# Altium PCB Pinger Final PCB.PcbDoc
Units mil, origin at the board's own origin, x right, y up, seen from the top; angles counter-clockwise.
Board outline 2563 x 1768 mil, 2 copper layers (Top Layer, Bottom Layer); 33 components, 29 nets, 138 pads, 187 vias.
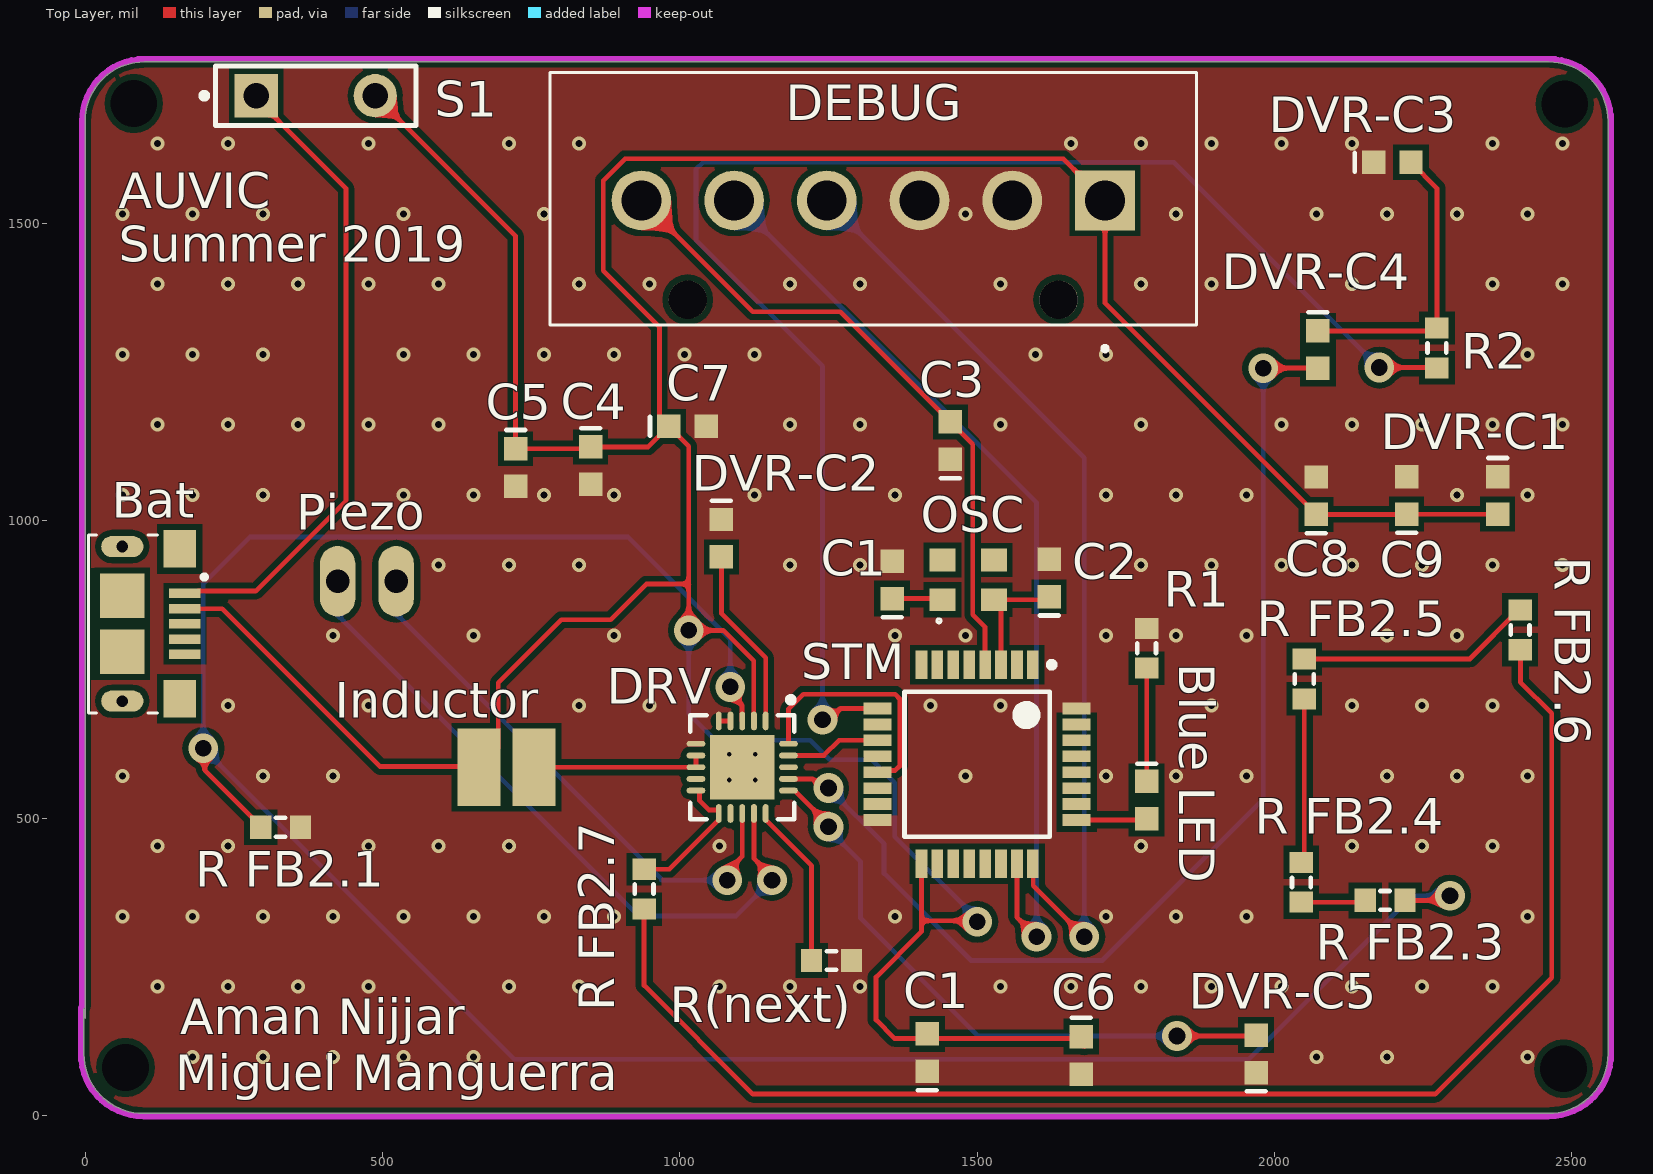
[diagram p0: Top Layer view]
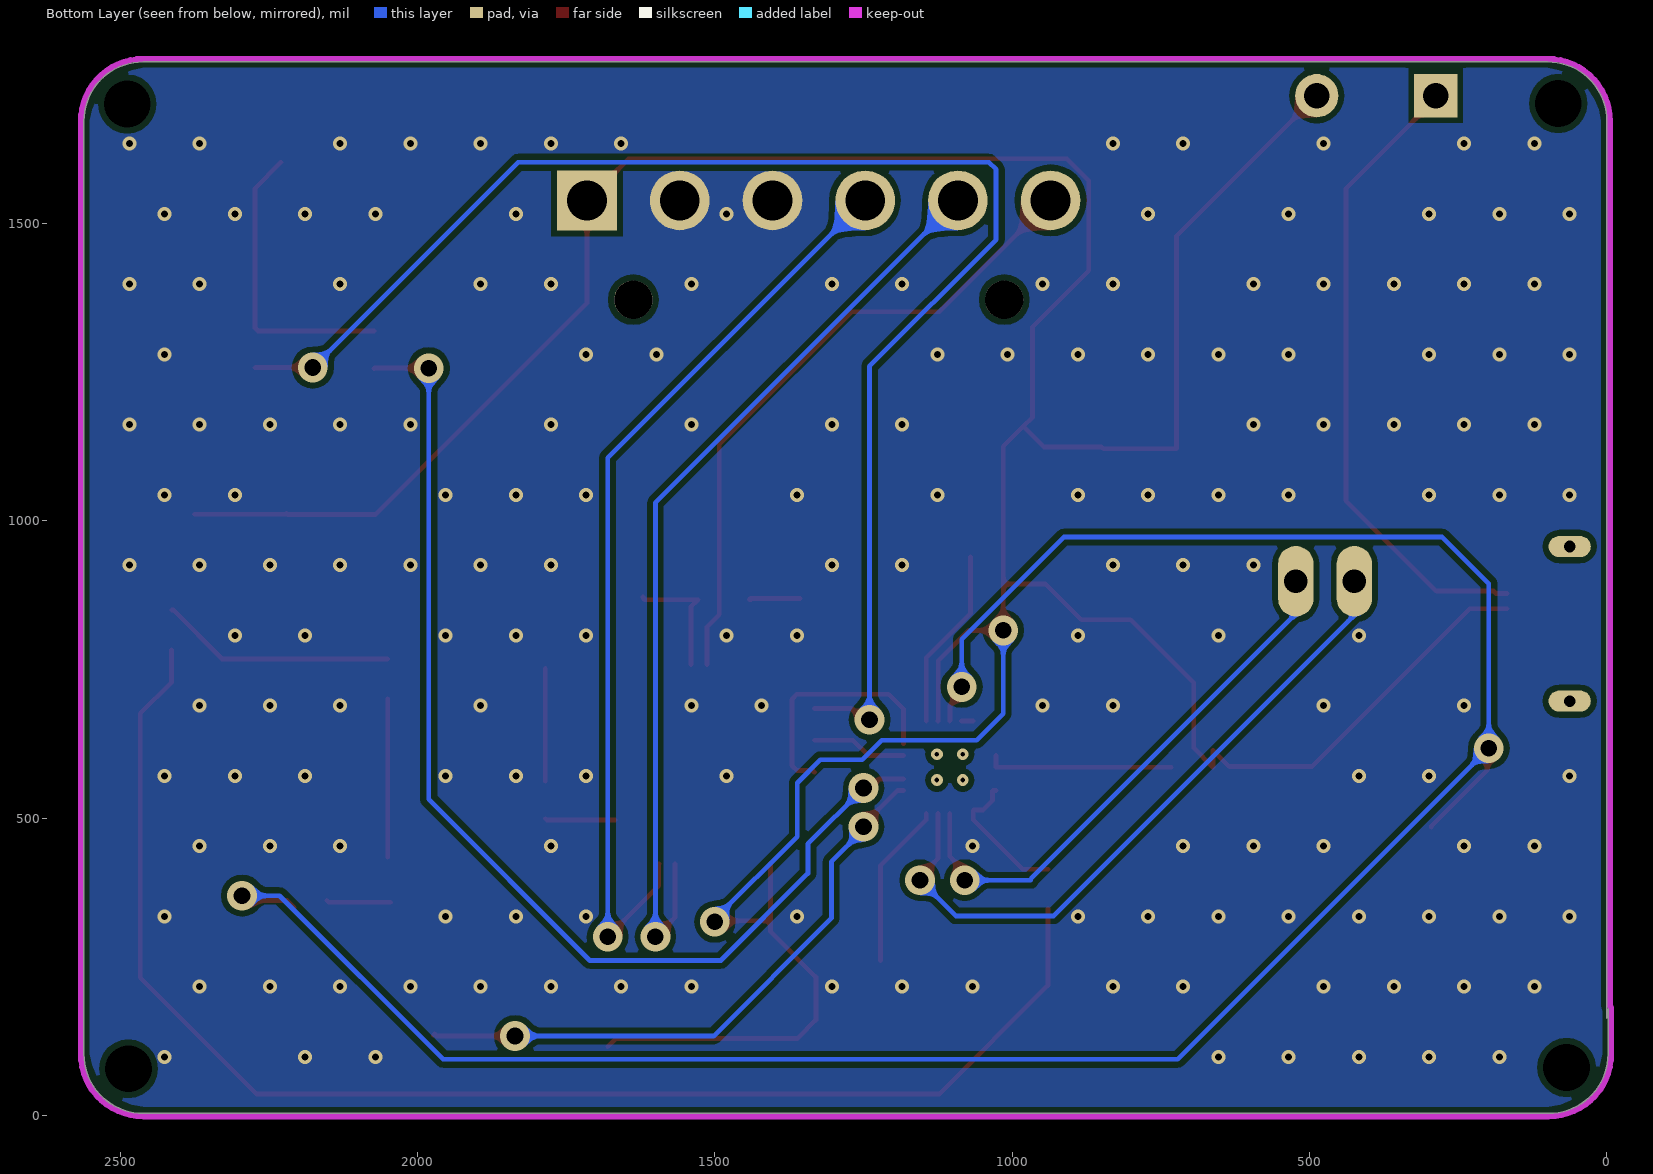
[diagram p1: Bottom Layer view, seen from below]
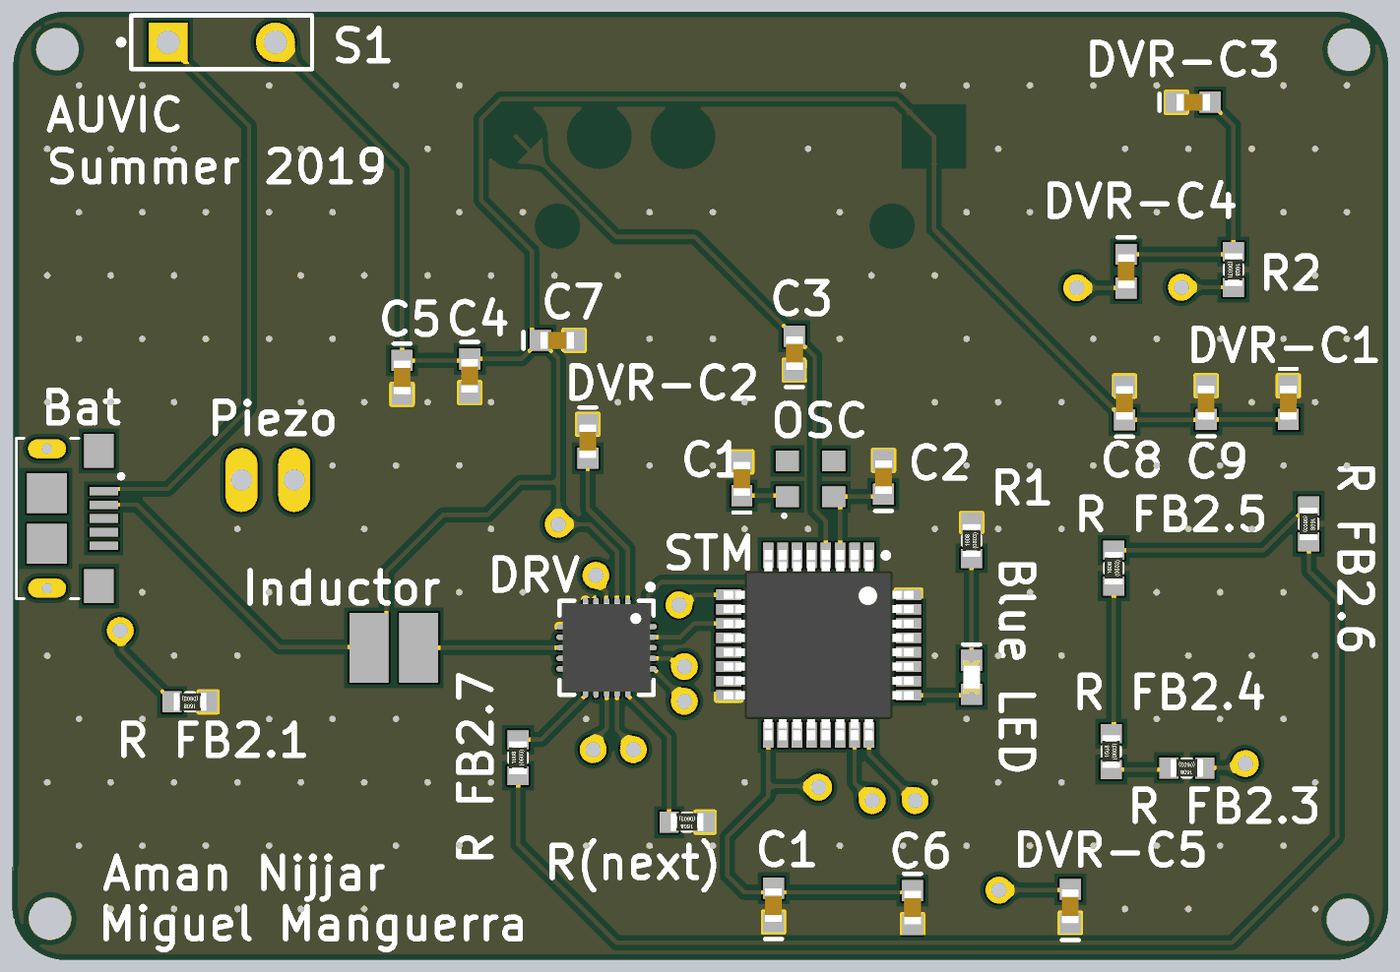
[diagram p2: 3D render of the assembled board from above, using the file's embedded part models]

## Layer stack, top to bottom
Top Solder: solder mask 0.4, Solder Resist, Dk 3.5
Top Layer: signal copper 1.4
Dielectric 1: dielectric 12.6, FR-4, Dk 4.8
Bottom Layer: signal copper 1.4
Bottom Solder: solder mask 0.4, Solder Resist, Dk 3.5

## Board outline
0,164 0,1672 cw(c100,1672) 100,1772 2461,1772 cw(c2461,1672) 2561,1672 2561,104 cw(c2461,104) 2461,4 98,4 cw(c98,104) -2,104 -2,180

## Design rules (kind name [scope] priority, off if disabled: settings)
Clearance [All] p1: gap=10 ignorepadtopadclearanceinfootprint=TRUE except(0: Arc-Hole Track-Hole SMDPad-Hole THPad-Hole Via-Hole Fill-Hole Poly-Hole Region-Hole Text-Hole)
PolygonConnect [All] p1: connectstyle=Direct reliefconductorwidth=10 reliefentries=4 polygonreliefangle="90 Angle" airgapwidth=10
RoutingVias [All] p1: holewidth=28 width=50 viastyle="Through Hole" minholewidth=28 minwidth=50 maxholewidth=28 maxwidth=50
SolderMaskExpansion [All] p1: expansion=4
Width [All] p1: maxlimit=8 minlimit=8 preferedwidth=8 minimp=50.000000 maximp=50.000000 favimp=50.000000
30 further rules are at their usual default settings.

## Classes and differential pairs
component class U_MicroController: "Blue LED" C6 C7 C8 C9 DEBUG DVR-C1 DVR-C2 DVR-C3 DVR-C4 DVR-C5 OSC R1 R2 STM
component class U_DRV2700: DRV DVR-C1 DVR-C2 DVR-C3 DVR-C4 DVR-C5 Inductor Piezo "R FB2.1" "R FB2.3" "R FB2.4" "R FB2.5" "R FB2.6" "R FB2.7" R(next)
component class "Master Schematic Sheet": Bat DVR-C3 S1

## Components (designator, comment, footprint, x,y, rotation, side; value= is the part's Value field where it differs from the comment)
Bat "600mAh 3.6V" *FCI_10118193-0001LF_10118193-0001LF(Primary) 62.68,827 r270 top
"Blue LED" "Blue" LED0603 1785,531 r90 top
C1 "Cap" "CAPC1608N(0603\")" 1416,106 r90 top value=4.7uF
C1 "Cap" "CAPC1608N(0603\")" 1357,901 r90 top value="18 pF"
C2 "Cap" "CAPC1608N(0603\")" 1621,904 r90 top value="18 pF"
C3 "Cap" "CAPC1608N(0603\")" 1455,1135 r90 top value=0.1uF
C4 "Cap" "CAPC1608N(0603\")" 850,1093 r270 top value=0.1uF
C5 "Cap" "CAPC1608N(0603\")" 724,1090 r270 top value=4.7uF
C6 "Cap" "CAPC1608N(0603\")" 1675,101.5 r270 top value=4.7uF
C7 "Cap" "CAPC1608N(0603\")" 1013,1159 r0 top value=0.1uF
C8 "Cap" "CAPC1608N(0603\")" 2070,1042.5 r90 top value=1uF
C9 "Cap" "CAPC1608N(0603\")" 2222,1043 r90 top value=0.01uF
DEBUG "SWD_DEBUGGER" Male_header 2820.24,519 r180 top
DRV "DRV2700" QFN50P400X400X100_HS-21N 1105,586 r270 top
DVR-C1 "+10V rating and X5R or X7R" "CAPC1608N(0603\")" 2375,1043 r270 top value=0.1uF
DVR-C2 "+10V rating and X5R or X7R" "CAPC1608N(0603\")" 1070,971 r270 top value=0.1uF
DVR-C3 "Cap" "CAPC1608N(0603\")" 2198,1603 r0 top value=0.1uF
DVR-C4 "Cap" "CAPC1608N(0603\")" 2073,1288 r270 top value=0.1uF
DVR-C5 "Cap" "CAPC1608N(0603\")" 1969,104 r90 top value=0.1uF
Inductor "CoilCraft" INDP2828X23N 708.74,586 r180 top value=3.3uH
OSC "ABMM2-14.7456MHZ-E2-T" *OSCSC320X250X100N 1485,901 r90 top
Piezo "Pinger" *JST_XHP-2 474,878 r180 top (schematic designator P1)
R1 "Res2" "RESC1608N(0603\")" 1785,786 r90 top value=1K
R2 "Res2" "RESC1608N(0603\")" 2273,1291 r270 top value=4.99K
"R FB2.1" "Res2" "RESC1608N(0603\")" 329,485 r180 top value=10.5K
"R FB2.3" "Res2" "RESC1608N(0603\")" 2186,362 r180 top value=200k
"R FB2.4" "Res2" "RESC1608N(0603\")" 2045,392.46 r90 top value=200k
"R FB2.5" "Res2" "RESC1608N(0603\")" 2050,734.46 r90 top value=200k
"R FB2.6" "Res2" "RESC1608N(0603\")" 2413,817 r270 top value=200k
"R FB2.7" "Res2" "RESC1608N(0603\")" 940,381 r90 top value=10K
R(next) "Res2" "RESC1608N(0603\")" 1255,261 r180 top value=7.32k (schematic designator R(rext))
S1 "SW-SPST" SPST-2 388,1715 r0 top
STM "STM32F051K6T6" TQFP68P900X900X160-32N 1500,591 r270 top

## Footprints (in the part's own frame and the unit in brackets; to place one, negate y for a bottom-side part, rotate by r counter-clockwise, add the part's x,y. Pads: shape width x height; smd on the part's side, far side on the other; paste and mask are expansions set on the pad)
*FCI_10118193-0001LF_10118193-0001LF(Primary) [mm]
  rect 0.4x1.35 smd: 1(-1.3,2.675) 2(-0.65,2.675) 3(0,2.675) 4(0.65,2.675) 5(1.3,2.675)
  round 0.5 hole 0.5 unplated: None(-3.3,0) None(3.3,0)
  rect 1.6x1.4 smd: S1(-3.2,2.45) S2(3.2,2.45)
  rect 1.9x1.9 smd: S3(1.2,0) S4(-1.2,0)
  oval 0.9x1.8 hole 0.5: S5(-3.3,0) S6(3.3,0)
  silkscreen extent -3.8,-1.45 3.8,3.6
*JST_XHP-2 [mm]
  oval 1.508x3.016 hole 1: 1(-1.25,-0.525) 2(1.25,-0.525)
*OSCSC320X250X100N [mm]
  rect 0.98x1.1 smd: 1(-0.85,1.1) 2(-0.85,-1.1) 3(0.85,-1.1) 4(0.85,1.1)
  silkscreen extent -1.84,1.16 -1.66,1.34
"CAPC1608N(0603\")" [mm] "Chip Capacitor, Body 1.6x0.8mm (0603\"), IPC Medium Density"
  rect 1x1 smd: 1(-0.8,0) 2(0.8,0)
  silkscreen extent -1.6,-0.4 -1.6,0.4, body extent -0.8,-0.4 0.8,0.4, height 0.9
INDP2828X23N [mm] "Precision Wire Wound Inductor, 2-Leads, Body 2.80x2.80mm, IPC Medium Density"
  rect 1.85x3.3 smd: 1(-1.175,0) 2(1.175,0)
  body extent -1.5,-1.5 1.5,1.5, height 2.29
LED0603 [mm]
  rect 1x1 smd: 1(0.8,0) 2(-0.8,0)
  silkscreen extent 1.55,-0.4 1.55,0.4, body extent -0.8,-0.4 0.8,0.4, height 0.69
Male_header [mm]
  rect 2.55x2.55 hole 1.7: 1(28.073,-25.908)
  round 2.55 hole 1.7: 2(32.033,-25.908) 3(35.993,-25.908) 4(39.953,-25.908) 5(43.913,-25.908) 6(47.873,-25.908)
  round 1.63 hole 1.63 unplated: None(30.053,-21.668) None(45.893,-21.668)
  silkscreen extent 24.16,-31.38 51.78,-19.48
QFN50P400X400X100_HS-21N [mm] "QFN, 20-Leads, Body 4.00x4.00mm, Pitch 0.50mm, Thermal Pad 2.75x2.75mm, IPC Medium Density"
  oval 0.8x0.25 smd: 1(-1.975,1) 2(-1.975,0.5) 3(-1.975,0) 4(-1.975,-0.5) 5(-1.975,-1) 11(1.975,-1) 12(1.975,-0.5) 13(1.975,0) 14(1.975,0.5) 15(1.975,1)
  oval 0.25x0.8 smd: 6(-1,-1.975) 7(-0.5,-1.975) 8(0,-1.975) 9(0.5,-1.975) 10(1,-1.975) 16(1,1.975) 17(0.5,1.975) 18(0,1.975) 19(-0.5,1.975) 20(-1,1.975)
  rect 2.75x2.75 smd: 21(0,0)
  silkscreen extent -3,-2.22 2.22,2.22, body extent -2.08,-2.08 2.08,2.08, height 1
"RESC1608N(0603\")" [mm] "Chip Resistor, Body 1.6x0.8mm (0603\"), IPC Medium Density"
  rect 0.9x1 smd: 1(-0.85,0) 2(0.85,0)
  silkscreen extent -0.2,-0.4 0.2,0.4, body extent -0.77,-0.42 0.78,0.43, height 0.44
SPST-2 [mm] "Switch; 2 Leads"
  rect 1.85x1.85 hole 1.1: 1(-2.54,0)
  round 1.85 hole 1.1: 2(2.54,0)
  silkscreen extent -4.89,-1.27 4.28,1.27
TQFP68P900X900X160-32N [mm] "TQFP, 32-Leads, Body 7.00x7.00mm, Pitch 0.68mm, IPC Medium Density"
  rect 1.2x0.5 smd: 1(-4.25,2.38) 2(-4.25,1.7) 3(-4.25,1.02) 4(-4.25,0.34) 5(-4.25,-0.34) 6(-4.25,-1.02) 7(-4.25,-1.7) 8(-4.25,-2.38) 17(4.25,-2.38) 18(4.25,-1.7) 19(4.25,-1.02) 20(4.25,-0.34) 21(4.25,0.34) 22(4.25,1.02) 23(4.25,1.7) 24(4.25,2.38)
  rect 0.5x1.2 smd: 9(-2.38,-4.25) 10(-1.7,-4.25) 11(-1.02,-4.25) 12(-0.34,-4.25) 13(0.34,-4.25) 14(1.02,-4.25) 15(1.7,-4.25) 16(2.38,-4.25) 25(2.38,4.25) 26(1.7,4.25) 27(1.02,4.25) 28(0.34,4.25) 29(-0.34,4.25) 30(-1.02,4.25) 31(-1.7,4.25) 32(-2.38,4.25)
  silkscreen extent -4.37,-3.1 3.1,3.3, body extent -4.5,-4.5 4.5,4.5, height 1.6

## Part data
Bat: library part Battery, "Multicell Battery", LatestRevisionDate=17-Jul-2002, LatestRevisionNote="Re-released for DXP Platform.", PackageDescription="Battery; 2 Leads", PackageReference=BAT-2, Published=24-Mar-1999, Publisher="Altium Limited"
"Blue LED": library part "LED, 0603 (1608), Blue, Clear", "LED, 0603 (1608), Blue, Clear", Supplier Part Number 1=475-2816-6-ND, Colour=Blue, Created By="Lyden Smith", Date Created=2017-09-19, Supplier 1=Digi-Key
C1 C1 C2 C3 C4 C5 C6 C7 C8 C9 DVR-C3: "Capacitor", LatestRevisionDate=17-Jul-2002, LatestRevisionNote="Re-released for DXP Platform.", PackageDescription="Radial Cap, Thru-Hole; 2 Leads; 0.3 in Pin Spacing", PackageReference=RAD-0.3, Published=8-Jun-2000, Publisher="Altium Limited"
DEBUG: library part SWD_Header
DRV: Supplier Part Number 1=595-DRV2700RGPT, Supplier 1=Mouser
DVR-C1 DVR-C2: library part Cap, "Capacitor", LatestRevisionDate=17-Jul-2002, LatestRevisionNote="Re-released for DXP Platform.", PackageDescription="Radial Cap, Thru-Hole; 2 Leads; 0.3 in Pin Spacing", PackageReference=RAD-0.3, Published=8-Jun-2000, Publisher="Altium Limited"
DVR-C4: "must have 105V rating", LatestRevisionDate=17-Jul-2002, LatestRevisionNote="Re-released for DXP Platform.", PackageDescription="Radial Cap, Thru-Hole; 2 Leads; 0.3 in Pin Spacing", PackageReference=RAD-0.3, Published=8-Jun-2000, Publisher="Altium Limited"
DVR-C5: "must have a 105V rating", LatestRevisionDate=17-Jul-2002, LatestRevisionNote="Re-released for DXP Platform.", PackageDescription="Radial Cap, Thru-Hole; 2 Leads; 0.3 in Pin Spacing", PackageReference=RAD-0.3, Published=8-Jun-2000, Publisher="Altium Limited"
Inductor: library part Inductor, "LPS4018-332MLB", Code_IEC=1005, Code_JEITA=0402, LatestRevisionDate=29-May-2009, LatestRevisionNote="IPC-7351 Footprint Added.", PackageDescription="Chip Inductor", PackageReference=0402-A, Published=8-Jun-2000, Publisher="Altium Limited"
OSC: library part XTAL, "Crystal Oscillator", LatestRevisionDate=17-Jul-2002, LatestRevisionNote="Re-released for DXP Platform.", PackageDescription="Crystal, Thru-Hole; 2 Leads; Body 3.1 x 8.2 mm (Dia.xH)", PackageReference=R38, Published=8-Jun-2000, Publisher="Altium Limited"
Piezo: library part "Header 2X2", "Header, 2-Pin, Dual row", LatestRevisionDate=17-Jul-2002, LatestRevisionNote="Re-released for DXP Platform.", Publisher="Altium Limited"
R1 R2 "R FB2.1" "R FB2.3" "R FB2.4" "R FB2.5" "R FB2.6" "R FB2.7": "Resistor", LatestRevisionDate=17-Jul-2002, LatestRevisionNote="Re-released for DXP Platform.", PackageDescription="Axial Device, Thru-Hole; 2 Leads; 0.4 in Pin Spacing", PackageReference=AXIAL-0.4, Published=8-Jun-2000, Publisher="Altium Limited"
  "R FB2.3" "R FB2.4" "R FB2.5" "R FB2.6" "R FB2.7": Digikey=RC0201FR-07200KL
R(next): "Current-Limiting Control Resistor", LatestRevisionDate=17-Jul-2002, LatestRevisionNote="Re-released for DXP Platform.", PackageDescription="Axial Device, Thru-Hole; 2 Leads; 0.4 in Pin Spacing", PackageReference=AXIAL-0.4, Published=8-Jun-2000, Publisher="Altium Limited"
S1: "Single-Pole, Single-Throw Switch", LatestRevisionDate=17-Jul-2002, LatestRevisionNote="Re-released for DXP Platform.", PackageDescription="Switch; 2 Leads", PackageReference=SPST-2, Published=24-Mar-1999, Publisher="Altium Limited"
STM: Supplier Part Number 1=511-STM32F051K6T6, Supplier 1=Mouser

## Free pads (board coordinates)
  round 60 hole 78.74: 7(2486,79) 8(68,81) 9(2488,1701) 10(82,1702)

## Via types
v1: diameter 23.62, hole 11.81, Top Layer to Bottom Layer, tented both sides, 168 vias
v2: diameter 50, hole 28, Top Layer to Bottom Layer, 15 vias
v3: diameter 19.68, hole 7.87, Top Layer to Bottom Layer, 4 vias

## Nets (pads, with @x,y where several pads share a name; then routed paths per layer and width w, separated by ;. In a path a pad name is that pad's centre, name@x,y a point inside that pad or via, vN(x,y) a via of type N, cw(c..) or ccw(c..) an arc to the next point about the centre after c; other vN are vias at no path point)
3V6: Bat.2 C1.2@1416,137.5 C4.1 C5.1 C6.1 C7.1 C8.1 C9.1 DEBUG.1 DRV.2 DVR-C1.2 Inductor.2 S1.2 STM.17 | length 6653.3
  Top Layer w8: Bat.2 230.41,852.59 496,587 634.94,587 662.48,614.54 Inductor.2 694.9,618.42 694.9,727.91 800.99,834 883.82,834 943.82,894 1015,894 ; S1.2 724,1479 C5.1 847,1121.5 C4.1 947,1124.5 C7.1 ; DRV.2 1124.33,664.11 1124.33,764.69 1073.02,816 v2(1015,816) 1015,894 ; STM.17 1406.3,328 ; v2(1500,326) ccw(c1498,326) 1498,328 1406.3,328 ; C6.1@1680,116 1666,130 1361,130 1330,161 1330,233.22 1406.3,309.52 1406.3,328 ; DVR-C1.2 C9.1 2220.5,1013 2218.5,1011 C8.1 1715,1366 DEBUG.1 1645,1609 908,1609 871.28,1572.28 871.28,1420.75 965.82,1326.21 965.82,1174.69 C7.1 ; C7.1 1015,1125.5 1015,894
  Bottom Layer w8: v2(1015,816) 1015,676 1059.5,631.5 1219.35,631.5 1223.85,627 1252.42,598.42 1322.58,598.42 1361.56,559.44 1361.56,469.44 1500,331 v2(1500,326)
4V3: "R FB2.1.2" "R FB2.3.1" DRV.3 | length 4110.3
  Top Layer w8: v2(199,618) 201.5,615.5 201.5,581 295.54,486.97 295.54,485 ; v2(1085,721) 1085,709.63 1104.65,689.99 1104.65,664.11 DRV.3 ; 2207,349.54 2219.46,362 2287,362 v2(2295,370)
  Bottom Layer w8: v2@198.73,616 198.73,894.73 277,973 913.15,973 1085,801.15 v2(1085,721) ; v2(199,618) 722,95 1957,95 2232,370 v2(2295,370)
103V62: "R FB2.7.2" DRV.10 DRV.11 | length 237.5
  Top Layer w8: 940,414.46 982.68,414.46 1065.63,497.42 DRV.11 1065.63,513.37 1064.78,514.22 1048.71,514.22 1033.22,529.71 1033.22,545.78 1032.37,546.63 DRV.10
GND: "R FB2.1.1" C1.1@1416,74.5 C1.2@1357,932.5 C2.2 C3.1 C4.2 C5.2 C6.2 C7.2 C8.2 C9.2 DEBUG.2 DEBUG.3 DRV.4 DRV.5 DRV.6 DVR-C1.1 DVR-C2.1 DVR-C3.1 DVR-C5.1 R1.2 R(next).1 STM.16 STM.32 | length 19.7
  Top Layer w8: DRV.5 DRV.4
  other v1: 181.1,98.87 299.21,98.87 417.32,98.87 535.43,98.87 653.54,98.87 2070.87,98.87 2188.98,98.87 2425.2,98.87 122.05,216.98 240.16,216.98 358.27,216.98 476.38,216.98 712.6,216.98 830.71,216.98 1066.93,216.98 1185.04,216.98 1303.15,216.98 1539.37,216.98 1657.48,216.98 1775.59,216.98 1893.7,216.98 2011.81,216.98 2129.92,216.98 2248.03,216.98 2366.14,216.98 62.99,335.09 181.1,335.09 299.21,335.09 417.32,335.09 535.43,335.09 653.54,335.09 771.65,335.09 889.76,335.09 1362.2,335.09 1716.53,335.09 1834.64,335.09 1952.76,335.09 2425.2,335.09 122.05,453.2 240.16,453.2 476.38,453.2 594.49,453.2 712.6,453.2 1066.93,453.2 1775.59,453.2 2129.92,453.2 2248.03,453.2 2366.14,453.2 62.99,571.31 299.21,571.31 417.32,571.31 1480.31,571.31 1716.53,571.31 1834.64,571.31 1952.76,571.31 2188.98,571.31 2307.09,571.31 2425.2,571.31 240.16,689.42 476.38,689.42 830.71,689.42 948.82,689.42 1421.26,689.42 1539.37,689.42 1893.7,689.42 2129.92,689.42 2248.03,689.42 2366.14,689.42 417.32,807.53 653.54,807.53 889.76,807.53 1362.2,807.53 1480.31,807.53 1716.53,807.53 1834.64,807.53 1952.76,807.53 2188.98,807.53 2307.09,807.53 594.49,925.64 712.6,925.64 830.71,925.64 1185.04,925.64 1303.15,925.64 1775.59,925.64 1893.7,925.64 2011.81,925.64 2129.92,925.64 2248.03,925.64 2366.14,925.64 2484.25,925.64 62.99,1043.76 181.1,1043.76 299.21,1043.76 535.43,1043.76 653.54,1043.76 771.65,1043.76 889.76,1043.76 1125.98,1043.76 1362.2,1043.76 1716.53,1043.76 1834.64,1043.76 1952.76,1043.76 2307.09,1043.76 2425.2,1043.76 122.05,1161.87 240.16,1161.87 358.27,1161.87 476.38,1161.87 594.49,1161.87 1185.04,1161.87 1303.15,1161.87 1539.37,1161.87 1775.59,1161.87 2011.81,1161.87 2129.92,1161.87 2248.03,1161.87 2366.14,1161.87 2484.25,1161.87 62.99,1279.98 181.1,1279.98 299.21,1279.98 535.43,1279.98 653.54,1279.98 771.65,1279.98 889.76,1279.98 1007.87,1279.98 1125.98,1279.98 1598.42,1279.98 1716.53,1279.98 2425.2,1279.98 122.05,1398.09 240.16,1398.09 358.27,1398.09 476.38,1398.09 594.49,1398.09 830.71,1398.09 948.82,1398.09 1185.04,1398.09 1303.15,1398.09 1539.37,1398.09 1775.59,1398.09 1893.7,1398.09 2129.92,1398.09 2366.14,1398.09 2484.25,1398.09 62.99,1516.2 181.1,1516.2 299.21,1516.2 535.43,1516.2 771.65,1516.2 1480.31,1516.2 1834.64,1516.2 2070.87,1516.2 2188.98,1516.2 2307.09,1516.2 2425.2,1516.2 122.05,1634.31 240.16,1634.31 476.38,1634.31 712.6,1634.31 830.71,1634.31 1657.48,1634.31 1775.59,1634.31 1893.7,1634.31 2011.81,1634.31 2129.92,1634.31 2366.14,1634.31 2484.25,1634.31
NetBat_1: Bat.1 S1.1 | length 1086.2
  Top Layer w8: Bat.1 186.7,878.18 190.57,882.06 287.06,882.06 439,1034 439,1559 S1.1@283,1715 ; S1.1 S1.1@288,1720
"NetBlue LED_1": "Blue LED.1" R1.1 | length 190
  Top Layer w8: 1785,562.5 R1.1
"NetBlue LED_2": "Blue LED.2" STM.25 | length 118.6
  Top Layer w8: STM.25 1782.8,497.3 1785,499.5
NetC1_1: C1.1@1357,869.5 OSC.1 | length 88.2
  Top Layer w8: C1.1@1357,869.5 1439.72,869.5 cw(c1439.72,867.54) OSC.1 OSC.1@1439.33,867.54
NetC2_1: C2.1 OSC.2 STM.3 | length 209.7
  Top Layer w8: STM.3 1540.16,855.69 OSC.2 1616.03,867.54 ccw(c1616.03,872.5) C2.1
NetC3_2: C3.2 DEBUG.6 STM.4 | length 1106.2
  Top Layer w8: DEBUG.6 1122.72,1351.75 1269.74,1351.75 C3.2 1492.65,1128.84 1492.65,842.45 1513.39,821.71 STM.4
NetDEBUG_4: DEBUG.4 STM.24 | length 1575.7
  Top Layer w8: STM.24 1594.35,423.03 1594.35,386.65 v2(1680,301)
  Bottom Layer w8: DEBUG.4 1680,1106.28 v2(1680,301)
NetDEBUG_5: DEBUG.5 STM.23 | length 1585.1
  Top Layer w8: STM.23 1566.93,334.07 v2(1600,301)
  Bottom Layer w8: DEBUG.5 1600,1030.38 v2(1600,301)
NetDRV_1: DRV.1 DVR-C2.2 | length 306.6
  Top Layer w8: DVR-C2.2 1070,844.48 1144.37,770.11 DRV.1
NetDRV_7: DRV.7 DRV.8 Inductor.1 | length 314.4
  Top Layer w8: Inductor.1@732.56,586 DRV.8 DRV.7
NetDRV_13: DRV.13 Piezo.1 | length 899.3
  Top Layer w8: v2(1080,396) 1080,411 1105,436 DRV.13
  Bottom Layer w8: Piezo.1@518.21,878.33 518.21,848.65 967.86,399 ; 968.86,396 v2(1080,396)
NetDRV_14: DRV.14 Piezo.2 | length 1124.7
  Top Layer w8: DRV.14 1124.68,432.68 1155,402.37 v2(1155,396)
  Bottom Layer w8: Piezo.2@420.79,875.33 420.79,845.65 930.43,336 1095,336 v2(1155,396)
NetDRV_15: DRV.15 R(next).2 | length 279.2
  Top Layer w8: DRV.15 1144.37,497.42 1221.54,420.25 1221.54,261
NetDRV_16: DRV.16 DVR-C5.2 | length 1024.9
  Top Layer w8: DRV.16 1193.08,546.63 1250,489.71 v2(1250,486) ; v2(1836,134) 1967.5,134 DVR-C5.2 1971.25,137.75 DVR-C5.2@1973.5,135.5
  Bottom Layer w8: v2(1250,486) 1250,481.15 1304,427.15 1304,332 1502,134 v2(1836,134)
NetDRV_17: DRV.17 DVR-C4.2 | length 1883.5
  Top Layer w8: DRV.17 1223.32,566.32 1238.63,551 v2(1250,551) ; v2(1981,1257) 2072.5,1257 DVR-C4.2
  Bottom Layer w8: v2(1250,551) 1343.56,457.44 1343.56,407.29 1489.85,261 1710,261 1981,532 v2(1981,1257)
NetDRV_18: DRV.18
NetDRV_19: DRV.19 STM.11 | length 160.5
  Top Layer w8: DRV.19 1242.3,605.68 1267.77,631.16 STM.11
NetDRV_20: DRV.20 STM.13 | length 413.4
  Top Layer w8: DRV.20 1182.76,683.76 1207.54,708.54 1362.1,708.54 1370.3,700.34 1370.3,588.74 1362.1,580.54 1335.61,580.54 STM.13
NetDVR-C3_2: DVR-C3.2 DVR-C4.1 R2.1 | length 498.6
  Top Layer w8: DVR-C4.1 2268.03,1319.5 R2.1 2273,1559.5 DVR-C3.2
NetR2_2: R2.2 STM.9 | length 2507.7
  Top Layer w8: v2(1240,666) 1251.37,666 1270.07,684.7 STM.9 ; v2(2176,1258) 2272.54,1258 R2.2
  Bottom Layer w8: v2(1240,666) 1240,1260 1027.18,1472.82 1027.18,1591.18 1039.2,1603.2 1830.8,1603.2 v2(2176,1258)
"NetR FB2.3_2": "R FB2.3.2" "R FB2.4.1" | length 108.8
  Top Layer w8: 2045,359 2149.54,359 2152.54,362
"NetR FB2.4_2": "R FB2.4.2" "R FB2.5.1" | length 266.5
  Top Layer w8: 2050,434.46 2050,701
"NetR FB2.5_2": "R FB2.5.2" "R FB2.6.1" | length 397.2
  Top Layer w8: 2050,767.93 2328.5,767.93 2411.03,850.46 2413,850.46
"NetR FB2.6_2": "R FB2.6.2" "R FB2.7.1" | length 2384.5
  Top Layer w8: 940,347.54 940,219 1122.69,36.31 2270.31,36.31 2466,232 2466,676.5 2413.5,729 2413.5,783.5
NetSTM_12: STM.12
pads on no net: Bat.3 Bat.4 Bat.5 Bat.None Bat.S1 Bat.S2 Bat.S3 Bat.S4 Bat.S5 Bat.S6 DEBUG.None DRV.9 DRV.12 DRV.21 OSC.3 OSC.4 STM.1 STM.2 STM.5 STM.6 STM.7 STM.8 STM.10 STM.14 STM.15 STM.18 STM.19 STM.20 STM.21 STM.22 STM.26 STM.27 STM.28 STM.29 STM.30 STM.31
copper on no net:
  other v3: 1083.35,564.35 1126.65,564.35 1083.35,607.65 1126.65,607.65

## Polygon pours and split planes (outlines as drawn)
GND on Top Layer "Top Layer-GND" (solid, pour order 6): 0,1349 0,1669 cw(c100,1669) 100,1769 2456,1772 cw(c2458,1667) 2563,1669 2563,103 cw(c2463,103) 2463,3 98,3 cw(c98,103) -2,103 -2,272
no net on Top Layer "Top Layer-No Net 2" (solid, pour order 4): 27,1748
no net on Top Layer "Top Layer-No Net" (solid, pour order 2): 0,2086
no net on Top Layer "Top Layer-No Net 1" (solid, pour order 0): 955,1366
GND on Bottom Layer "Bottom Layer-GND" (solid, pour order 8): 10,1121 10,1662 cw(c110,1662) 110,1762 2451,1762 cw(c2451,1662) 2551,1662 2551,115 cw(c2451,115) 2451,15 108,15 cw(c108,115) 8,115 8,143

## Keep-outs
Keep-Out Layer:
  lines w10: -7,180 cw(c-2,180) -5,184 ; -7,180 cw(c-2,180) -5,184 ; -7,180 -7,104 ccw(c98,104) 98,-1 2461,-1 ccw(c2461,104) 2566,104 2566,1672 ccw(c2461,1672) 2461,1777 100,1777 ccw(c100,1672) -5,1672 -5,184

## Silkscreen, mask and mechanical layers (free items; w line width, h text height)
Top Overlay:
  text "AUVIC  / Summer 2019" at 57,1436 h60
  text "Aman Nijjar" at 160,137 h60
  text "Miguel Manguerra" at 152,43 h60

## Text inside footprints (layer, text, board x,y; h text height)
Bat: Mechanical 4 "PCB END" at 1.66,639.99 h73.82 r270; Mechanical 4 "PCB END" at 1.66,639.99 h73.82 r270